# Altium PCB PCB1.PcbDoc
Units mm, origin at the board's own origin, x right, y up, seen from the top; angles counter-clockwise.
Board outline 52.07 x 43.18 mm, 2 copper layers (Top Layer, Bottom Layer); 7 components, 18 nets, 74 pads, 7 vias.
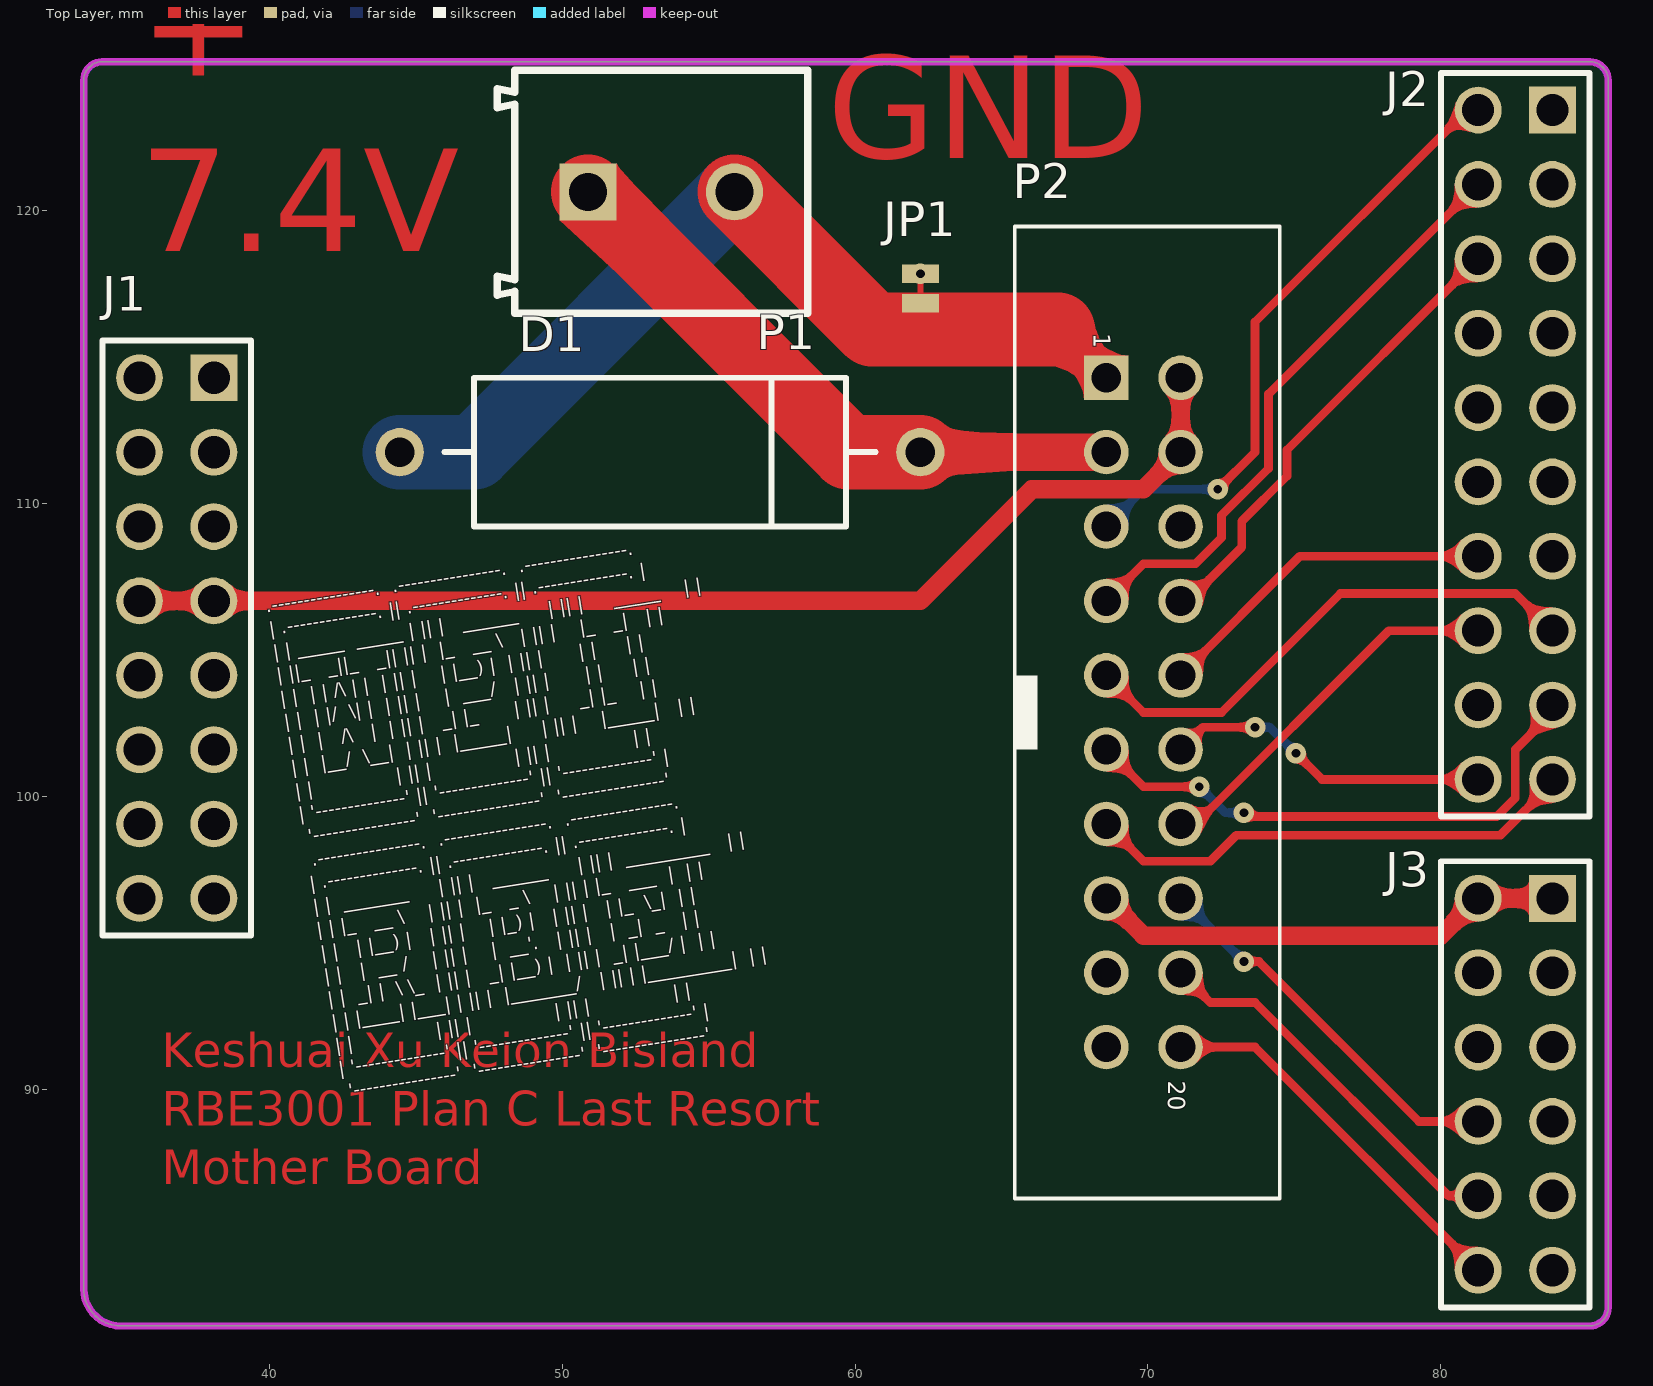
[diagram p0: Top Layer view]
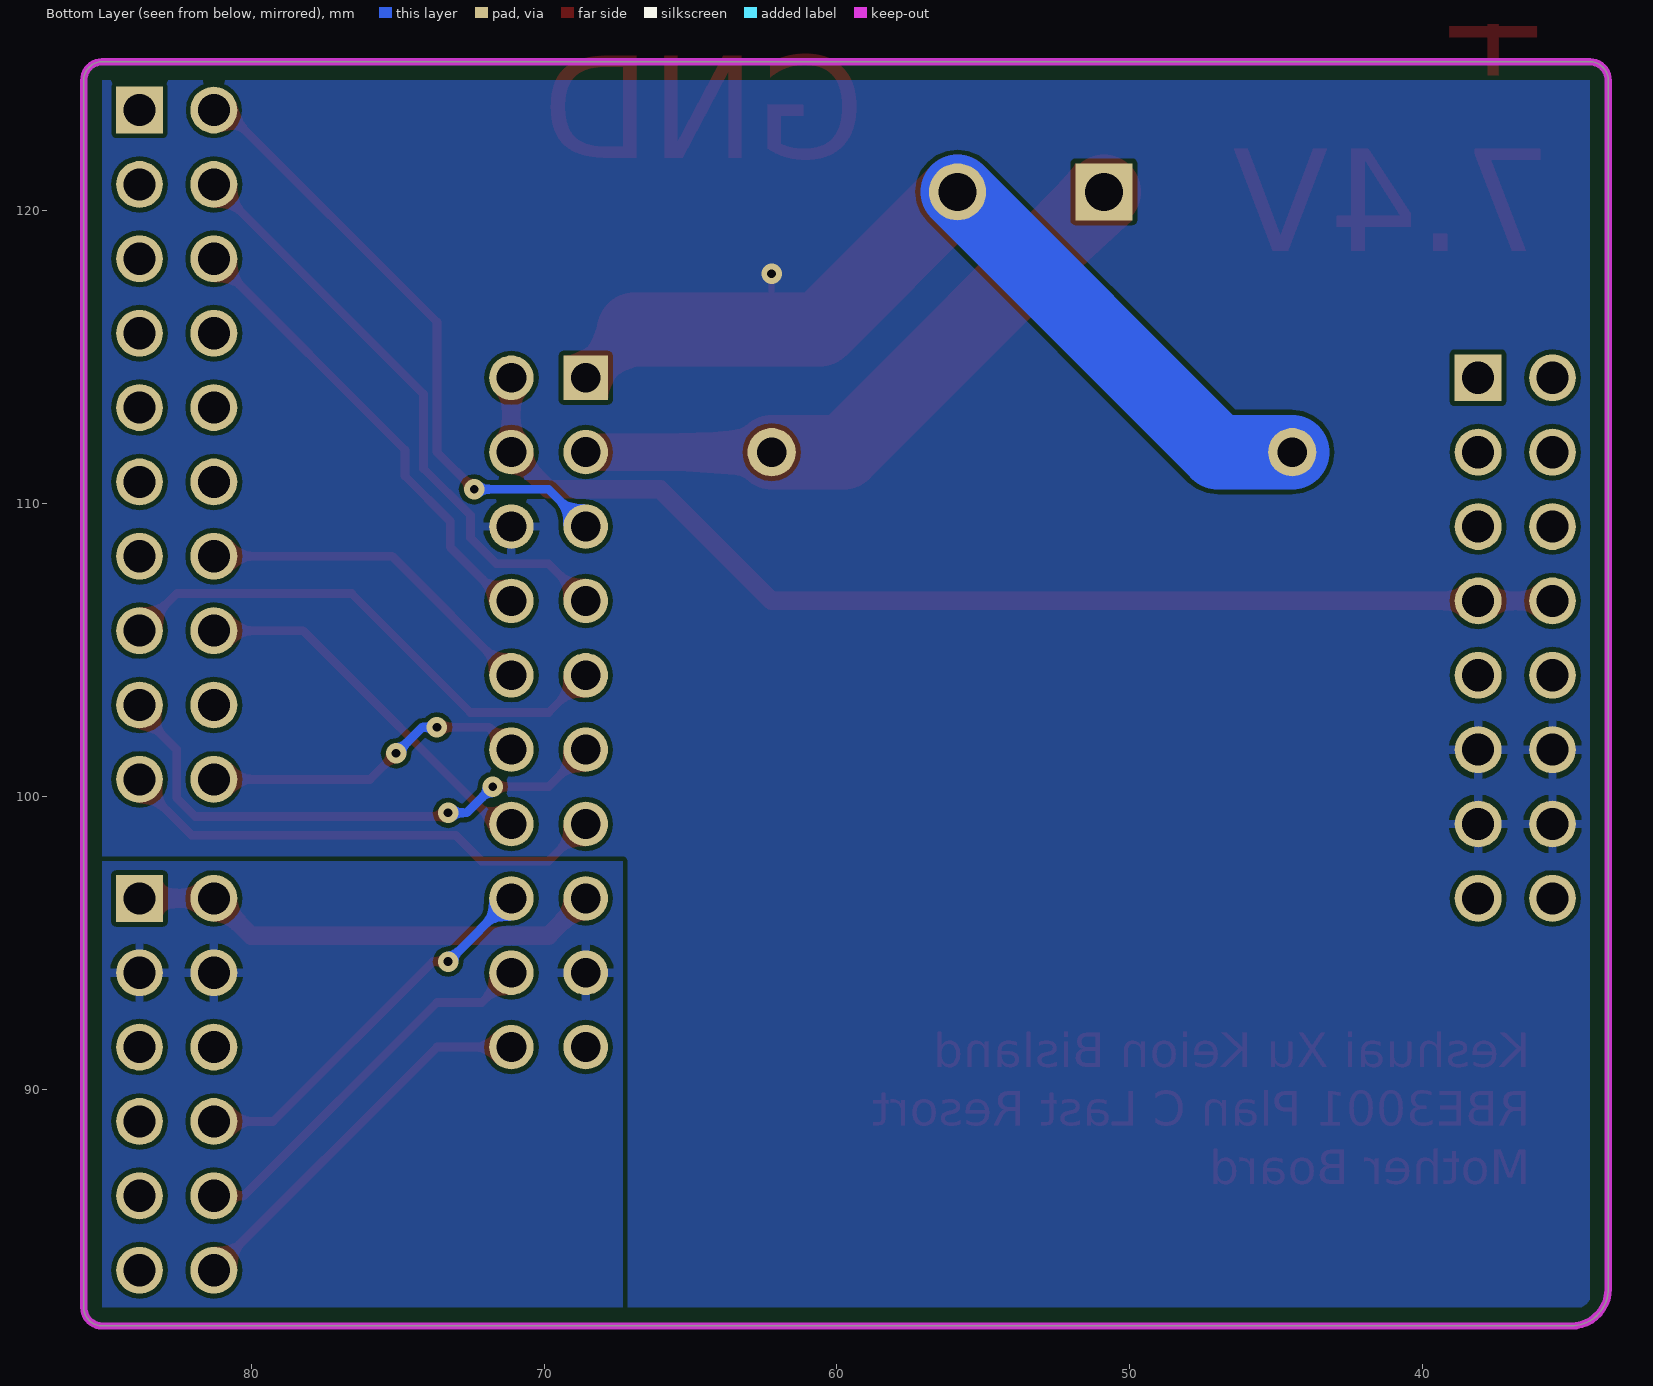
[diagram p1: Bottom Layer view, seen from below]
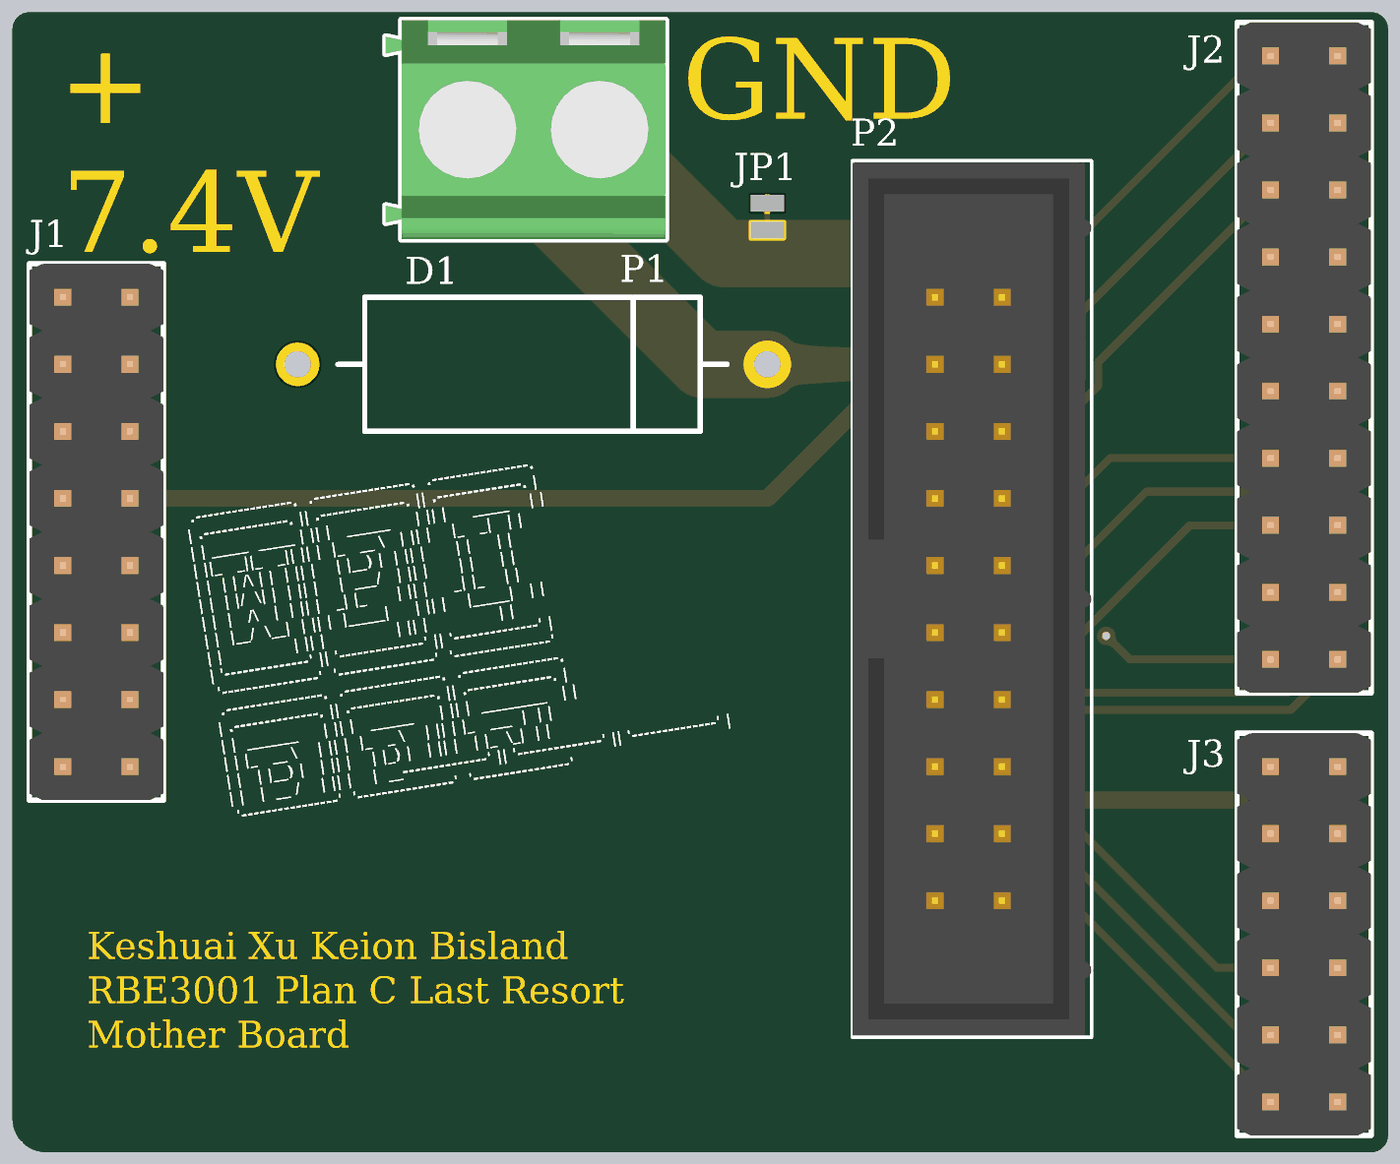
[diagram p2: 3D render of the assembled board from above, using the file's embedded part models]

## Layer stack, top to bottom
Top Solder: solder mask 0.0102, Solder Resist, Dk 3.5
Top Layer: signal copper 0.0356
Dielectric 1: dielectric 0.32, FR-4, Dk 4.8
Bottom Layer: signal copper 0.0356
Bottom Solder: solder mask 0.0102, Solder Resist, Dk 3.5

## Board outline
33.655,83.185 33.655,124.46 cw(c34.29,124.46) 34.29,125.095 85.09,125.095 cw(c85.09,124.46) 85.725,124.46 85.725,82.55 cw(c85.09,82.55) 85.09,81.915 34.925,81.915 cw(c34.925,83.185)

## Design rules (kind name [scope] priority, off if disabled: settings)
BoardOutlineClearance [InNetClass('All Nets')] p1: gap=0.381 ignorepadtopadclearanceinfootprint=FALSE
Clearance BoardEdge [All vs OnLayer('Keep-Out Layer')] p1: gap=0.4 ignorepadtopadclearanceinfootprint=FALSE
Clearance "Stitching GND" [IsStitchingVia and InNet('GND') vs (IsVia and (Not IsStitchingVia)) Or IsPad] p2 off: gap=0.127 ignorepadtopadclearanceinfootprint=FALSE except(0: Arc-Hole Track-Hole SMDPad-Hole THPad-Hole Via-Hole Fill-Hole Poly-Hole Region-Hole Text-Hole)
Clearance Clearance_outlinepolygon [inPolygon vs OnLayer('Keep-Out Layer')] p3 off: gap=0.4 ignorepadtopadclearanceinfootprint=FALSE except(0: Arc-Hole Track-Hole SMDPad-Hole THPad-Hole Via-Hole Fill-Hole Poly-Hole Region-Hole Text-Hole)
Clearance Clearance-polygonpolygon [InPolygon vs InPolygon] p4 off: gap=0.5 ignorepadtopadclearanceinfootprint=FALSE except(0: Arc-Hole Track-Hole SMDPad-Hole THPad-Hole Via-Hole Fill-Hole Poly-Hole Region-Hole Text-Hole)
Clearance Clearance_2 [All] p5: gap=0.16 ignorepadtopadclearanceinfootprint=FALSE
ComponentClearance [InComponentClass('no-clearance-check')] p1: gap=-999 collisioncheckmode=3 verticalgap=-999 showdistances=FALSE
ComponentClearance ComponentClearance_4 [All] p2: gap=0.254 collisioncheckmode=3 verticalgap=0.254 showdistances=FALSE
HoleSize [All] p1: absolutevalues=TRUE maxlimit=6 minlimit=0.3 maxpercent=80.000 minpercent=20.000
MinimumAnnularRing ignore [(HasFootprint('LMZ21701SIL') OR HasFootprint('m3 hole') OR HasFootprint('G3T-12AH'))] p1: minimumring=0
MinimumAnnularRing [All] p2: minimumring=0.178
MinimumSolderMaskSliver [All] p1: minsoldermaskwidth=0.076
NetAntennae [All] p1: netantennaetolerance=2
PolygonConnect PolygonConnect_heat [IsVia OR InPolygonClass('nothermalrelief') OR InPadClass('heatsink')] p1: connectstyle=Direct reliefconductorwidth=0.254 reliefentries=4 polygonreliefangle="90 Angle" airgapwidth=0.254
PolygonConnect [All] p2: connectstyle=Relief reliefconductorwidth=0.3 reliefentries=4 polygonreliefangle="90 Angle" airgapwidth=0.2
RoutingVias [All] p1: holewidth=0.3 width=0.3 viastyle="Through Hole" minholewidth=0.3 minwidth=0.62 maxholewidth=6.731 maxwidth=7.62 viatemplateguid#1={ECAECEE0-98E7-41BA-9EC3-9AF7EEB56C01} viatemplatename#1=signal
SilkToSilkClearance [All] p1 off: silktosilkclearance=0
SilkToSolderMaskClearance SilkToSolderMaskClearance_1 [HasFootprint('PAD-JUMPER-2-NO_YES_SILK')] p1: minsilkscreentomaskgap=0 clearancetoexposedcopper=TRUE
SilkToSolderMaskClearance [IsPad] p2: minsilkscreentomaskgap=0.15 clearancetoexposedcopper=TRUE
SolderMaskExpansion [All] p1: expansion=0.076
Width [All] p1: maxlimit=25.375 minlimit=0.152 preferedwidth=0.3
24 further rules are at their usual default settings.

## Components (designator, comment, footprint, x,y, rotation, side; value= is the part's Value field where it differs from the comment)
D1 "Zener 8.2V 5W" DIODE-0.7 53.34,111.76 r0 top
J1 "nucleo left" 61301621121 36.83,105.41 r270 top
J2 "nucleo right" 61302021121 82.55,112.014 r270 top
J3 "nucleo adc" 61301221121 82.55,90.17 r270 top
JP1 "JUMPER-PAD-2-NC_BY_TRACENO_SILK" PAD-JUMPER-2-NC_BY_TRACE_NO_SILK 62.23,117.348 r270 top net-tie
P1 "motor power" 691213710002 53.38,120.65 r0 top
P2 "hephaestus bus" 612020235121 69.85,102.87 r270 top

## Footprints (in the part's own frame and the unit in brackets; to place one, negate y for a bottom-side part, rotate by r counter-clockwise, add the part's x,y. Pads: shape width x height; smd on the part's side, far side on the other; paste and mask are expansions set on the pad)
61301221121 [mm] "12 pins, dual pin, straight, gold plating"
  rect 1.6x1.6 hole 1.1: 1(-6.35,1.27)
  round 1.6 hole 1.1: 2(-3.81,1.27) 3(-1.27,1.27) 4(1.27,1.27) 5(3.81,1.27) 6(6.35,1.27) 7(-6.35,-1.27) 8(-3.81,-1.27) 9(-1.27,-1.27) 10(1.27,-1.27) 11(3.81,-1.27) 12(6.35,-1.27)
  silkscreen extent -7.62,-2.54 7.62,2.54, body extent -7.62,-2.54 7.62,2.54, height 8.57
61301621121 [mm] "16 pins, dual pin, straight, gold plating"
  rect 1.6x1.6 hole 1.1: 1(-8.89,1.27)
  round 1.6 hole 1.1: 2(-6.35,1.27) 3(-3.81,1.27) 4(-1.27,1.27) 5(1.27,1.27) 6(3.81,1.27) 7(6.35,1.27) 8(8.89,1.27) 9(-8.89,-1.27) 10(-6.35,-1.27) 11(-3.81,-1.27) 12(-1.27,-1.27) 13(1.27,-1.27) 14(3.81,-1.27) 15(6.35,-1.27) 16(8.89,-1.27)
  silkscreen extent -10.16,-2.54 10.16,2.54, body extent -10.16,-2.54 10.16,2.54, height 8.57
61302021121 [mm] "20 pins, dual pin, straight, gold plating"
  rect 1.6x1.6 hole 1.1: 1(-11.43,1.27)
  round 1.6 hole 1.1: 2(-8.89,1.27) 3(-6.35,1.27) 4(-3.81,1.27) 5(-1.27,1.27) 6(1.27,1.27) 7(3.81,1.27) 8(6.35,1.27) 9(8.89,1.27) 10(11.43,1.27) 11(-11.43,-1.27) 12(-8.89,-1.27) 13(-6.35,-1.27) 14(-3.81,-1.27) 15(-1.27,-1.27) 16(1.27,-1.27) 17(3.81,-1.27) 18(6.35,-1.27) 19(8.89,-1.27) 20(11.43,-1.27)
  silkscreen extent -12.7,-2.54 12.7,2.54, body extent -12.7,-2.54 12.7,2.54, height 8.57
612020235121 [mm] "20 pins, straight, gold plating"
  rect 1.52x1.52 hole 1.02: 1(-11.43,-1.27)
  round 1.52 hole 1.02: 2(-11.43,1.27) 3(-8.89,-1.27) 4(-8.89,1.27) 5(-6.35,-1.27) 6(-6.35,1.27) 7(-3.81,-1.27) 8(-3.81,1.27) 9(-1.27,-1.27) 10(-1.27,1.27) 11(1.27,-1.27) 12(1.27,1.27) 13(3.81,-1.27) 14(3.81,1.27) 15(6.35,-1.27) 16(6.35,1.27) 17(8.89,-1.27) 18(8.89,1.27) 19(11.43,-1.27) 20(11.43,1.27)
  silkscreen extent -16.6,-4.4 16.6,4.65, body extent -16.53,-4.4 16.53,4.65, height 9.1
691213710002 [mm] "5,00mm - modular - green - Horizontal entry with rising cage clamp -  10,0mm height - 02p"
  rect 1.95x1.95 hole 1.3: 1(-2.5,0)
  round 1.95 hole 1.3: 2(2.5,0)
  silkscreen extent -5.6,-4.15 5,4.15, body extent -5.6,-4.15 5,4.15, height 10.05
DIODE-0.7 [mm] "Diode, Thru-Hole; 2 Leads; 0.7 in Pin Spacing"
  round 1.65 hole 1: 1(-8.89,0) 2(8.89,0)
  silkscreen extent -7.37,-2.54 7.37,2.54
PAD-JUMPER-2-NC_BY_TRACE_NO_SILK [mil]
  rect 25x50 smd: 1(-20,0) 2(20,0)
  Top Layer lines w8: 15,0 -15,0

## Part data
D1: library part "D Zener", "1N5344B-TP", LatestRevisionDate=17-Jul-2002, LatestRevisionNote="Re-released for DXP Platform.", PackageDescription="Diode, Thru-Hole; 2 Leads; 0.7 in Pin Spacing", PackageReference=DIODE-0.7, Published=8-Jun-2000, Publisher="Altium Limited"
J1: library part 61301621121, "WR-PHD 2.54 mm THT Dual Pin Header, 16p", ComponentLink1Description=Manufacturer, ComponentLink1URL=http://www.we-online.de, ComponentLink2Description=Datasheet, ComponentLink2URL=http://katalog.we-online.de/em/datasheet/6130xx21121.pdf, PartNumber=61301621121, PinNumber=16p, PublishedDate="July 2016", Publisher="Wurth Elektronik"
J2: library part 61302021121, "WR-PHD 2.54 mm THT Dual Pin Header, 20p", ComponentLink1Description=Manufacturer, ComponentLink1URL=http://www.we-online.de, ComponentLink2Description=Datasheet, ComponentLink2URL=http://katalog.we-online.de/em/datasheet/6130xx21121.pdf, PartNumber=61302021121, PinNumber=20p, PublishedDate="July 2016", Publisher="Wurth Elektronik"
J3: library part 61301221121, "WR-PHD 2.54 mm THT Dual Pin Header, 12p", ComponentLink1Description=Manufacturer, ComponentLink1URL=http://www.we-online.de, ComponentLink2Description=Datasheet, ComponentLink2URL=http://katalog.we-online.de/em/datasheet/6130xx21121.pdf, PartNumber=61301221121, PinNumber=12p, PublishedDate="July 2016", Publisher="Wurth Elektronik"
P1: library part 691213710002, "WR-TBL Serie 213 - 5.00 mm Horizontal Entry Modular, 2p", ComponentLink1Description=Manufacturer, ComponentLink1URL=http://www.we-online.de, ComponentLink2Description=Datasheet, ComponentLink2URL=http://katalog.we-online.de/em/datasheet/6912137100xx.pdf, Part Number=691213710002, Pin Number=2, Pitch="5 mm", Published Date="March 2017", Publisher="Wurth Elektronik"
P2: library part 612020235121, "WR-BHD 2.54mm Male Box Header High Temperature", Manufacturer="Wurth Elektronik", ComponentLink1 Description=Manufacturer, ComponentLink1URL=http://www.we-online.com, ComponentLink2 Description=Datasheet, ComponentLink2URL=http://katalog.we-online.de/em/datasheet/6120xx235121.pdf, Created by="Baojun Chen", Created Date="March 2016", NoPins=20, partNo=612020235121

## Via types
v1: diameter 0.7, hole 0.3, Top Layer to Bottom Layer, tented both sides, 7 vias

## Nets (pads, with @x,y where several pads share a name; then routed paths per layer and width w, separated by ;. In a path a pad name is that pad's centre, name@x,y a point inside that pad or via, vN(x,y) a via of type N, cw(c..) or ccw(c..) an arc to the next point about the centre after c; other vN are vias at no path point)
AGND: J3.2 J3.8 P2.17 | length 0
  Top Layer w0.3: J3.8@81.257,94.003 J3.8
CS1: J2.8 P2.9 | length 18
  Top Layer w0.3: P2.9 69.85,102.87 72.517,102.87 76.581,106.934 82.55,106.934 J2.8
CS2: J2.9 P2.11 | length 18.9
  Top Layer w0.3: P2.11 69.85,100.33 v1(71.755,100.33) ; v1(73.279,99.441) 73.406,99.314 81.915,99.314 82.55,99.949 82.55,101.6 83.82,102.87 J2.9
  Bottom Layer w0.3: v1(71.755,100.33) 72.644,99.441 v1(73.279,99.441)
CS3: J2.10 P2.13 | length 17
  Top Layer w0.3: P2.13 69.85,97.79 72.136,97.79 73.02,98.674 82.042,98.674 83.82,100.452 J2.10
GND: J1.6 J1.7 J1.14 J1.15 JP1.1 P2.6
  other v1: 62.23,117.856
LC1: J3.10 P2.16 | length 13.3
  Top Layer w0.3: v1(73.279,94.361) 73.798,94.361 79.259,88.9 J3.10
  Bottom Layer w0.3: P2.16 v1(73.279,94.361)
LC2: J3.11 P2.18 | length 13.3
  Top Layer w0.3: P2.18 72.136,92.964 73.66,92.964 80.264,86.36 J3.11
LC3: J3.12 P2.20 | length 13.3
  Top Layer w0.3: P2.20 73.66,91.44 J3.12
M+: D1.2 P1.1 P2.3 | length 21.4
  Top Layer w1.27: D1.2 P2.3
  Top Layer w2.54: P1.1 59.77,111.76 D1.2
M-: D1.1 JP1.2 P1.2 P2.1 | length 30.4
  Top Layer w1.27: 66.929,115.951 P2.1
  Top Layer w2.54: P1.2 60.579,115.951 66.929,115.951
  Bottom Layer w2.54: D1.1 46.99,111.76 P1.2
MISO: J2.20 P2.12 | length 11.2
  Top Layer w0.3: P2.12 71.882,102.362 v1(73.66,102.362) ; v1(75.057,101.473) 75.946,100.584 J2.20
  Bottom Layer w0.3: v1(73.66,102.362) 74.168,102.362 v1(75.057,101.473)
MOSI: J2.17 P2.10 | length 11.8
  Top Layer w0.3: P2.10 71.13,104.14 75.194,108.204 J2.17
PWM1: J2.11 P2.5 | length 21.2
  Top Layer w0.3: v1(72.39,110.49) 73.66,111.76 73.66,116.205 J2.11@80.899,123.444
  Top Layer w0.635: J2.11@80.899,123.444 J2.11
  Bottom Layer w0.3: P2.5 69.85,110.49 v1(72.39,110.49)
PWM2: J2.12 P2.7 | length 20.5
  Top Layer w0.3: P2.7 69.85,107.95 71.628,107.95 72.517,108.839 72.517,109.601 74.12,111.204 74.12,113.744 J2.12
PWM3: J2.13 P2.8 | length 16
  Top Layer w0.3: P2.8 71.374,106.68 73.208,108.514 73.208,109.403 74.752,110.947 74.752,111.836 J2.13
SCK: J2.18 P2.14 | length 12.9
  Top Layer w0.3: P2.14 71.628,99.06 78.232,105.664 J2.18
VCC33: J1.4 J1.12 P2.2 P2.4 | length 40.2
  Top Layer w0.635: J1.12 J1.4 62.23,106.68 66.04,110.49 69.85,110.49 P2.4 P2.2
VCCA: J3.1 J3.7 P2.15 | length 16.3
  Top Layer w0.635: P2.15 69.85,95.25 80.01,95.25 J3.7 J3.1
pads on no net: J1.1 J1.2 J1.3 J1.5 J1.8 J1.9 J1.10 J1.11 J1.13 J1.16 J2.1 J2.2 J2.3 J2.4 J2.5 J2.6 J2.7 J2.14 J2.15 J2.16 J2.19 J3.3 J3.4 J3.5 J3.6 J3.9 P2.19

## Polygon pours and split planes (outlines as drawn)
AGND on Bottom Layer "AGND" (solid, pour order 0): 85.09,97.79 67.31,97.79 67.31,82.55 85.09,82.55
GND on Bottom Layer "GND" (solid, pour order 2): 85.09,82.55 34.29,82.55 34.29,124.46 85.09,124.46

## Keep-outs
Keep-Out Layer:
  the board outline again, w0.254

## Other copper
Top Layer:
  text "GND" at 59.055,120.65 h6
  text "+ / 7.4V" at 35.56,117.475 h6
  text "Keshuai Xu Keion Bisland / RBE3001 Plan C Last Resort  / Mother Board" at 36.322,86.36 h2

## Silkscreen, mask and mechanical layers (free items; w line width, h text height)
Top Overlay:
  text ".----------------.  .----------------.  .----------------.  / | .--------------. || .--------------. || .--------------. | / | | _____  _____ | || |   ______     | || |     _____    | | / | ||_   _||_   _|| || |  |_   __ \   | || |    |_   _|   | | / | |  | | /\ | |  | || |    | |__) |  | || |      | |     | | / | |  | |/  \| |  | || |    |  ___/   | || |      | |     | | / | |  |   /\   |  | || |   _| |_      | || |     _| |_    | | / | |  |__/  \__|  | || |  |_____|     | || |    |_____|   | | / | |              | || |              | || |              | | / | '--------------' || '--------------' || '--------------' | /  '----------------'  '----------------'  '----------------'  /  .----------------.  .----------------.  .----------------.  / | .--------------. || .--------------. || .--------------. | / | |  _______     | || |   ______     | || |  _________   | | / | | |_   __ \    | || |  |_   _ \    | || | |_   ___  |  | | / | |   | |__) |   | || |    | |_) |   | || |   | |_  \_|  | | / | |   |  __ /    | || |    |  __'.   | || |   |  _|  _   | | / | |  _| |  \ \_  | || |   _| |__) |  | || |  _| |___/ |  | | / | | |____| |___| | || |  |_______/   | || | |_________|  | | / | |              | || |              | || |              | | / | '--------------' || '--------------' || '--------------' | /  '----------------'  '----------------'  '----------------'" at 42.545,89.535 h0.8 r8.97
Top Solder:
  text "GND" at 59.055,120.65 h6
  text "+ / 7.4V" at 35.56,117.475 h6
  text "Keshuai Xu Keion Bisland / RBE3001 Plan C Last Resort  / Mother Board" at 36.322,86.36 h2

## Text inside footprints (layer, text, board x,y; h text height)
P2: Top Overlay "20" at 70.485,90.297 h1 r270; Top Overlay "1" at 67.945,115.824 h1 r270